# Altium PCB MK2.PcbDoc (part 3 of 7)
Units mil, origin at the board's own origin, x right, y up, seen from the top; angles counter-clockwise.
Board outline 3950 x 3965 mil, 2 copper layers (Top Layer, Bottom Layer); 19 components, 37 nets, 113 pads, 8 vias.
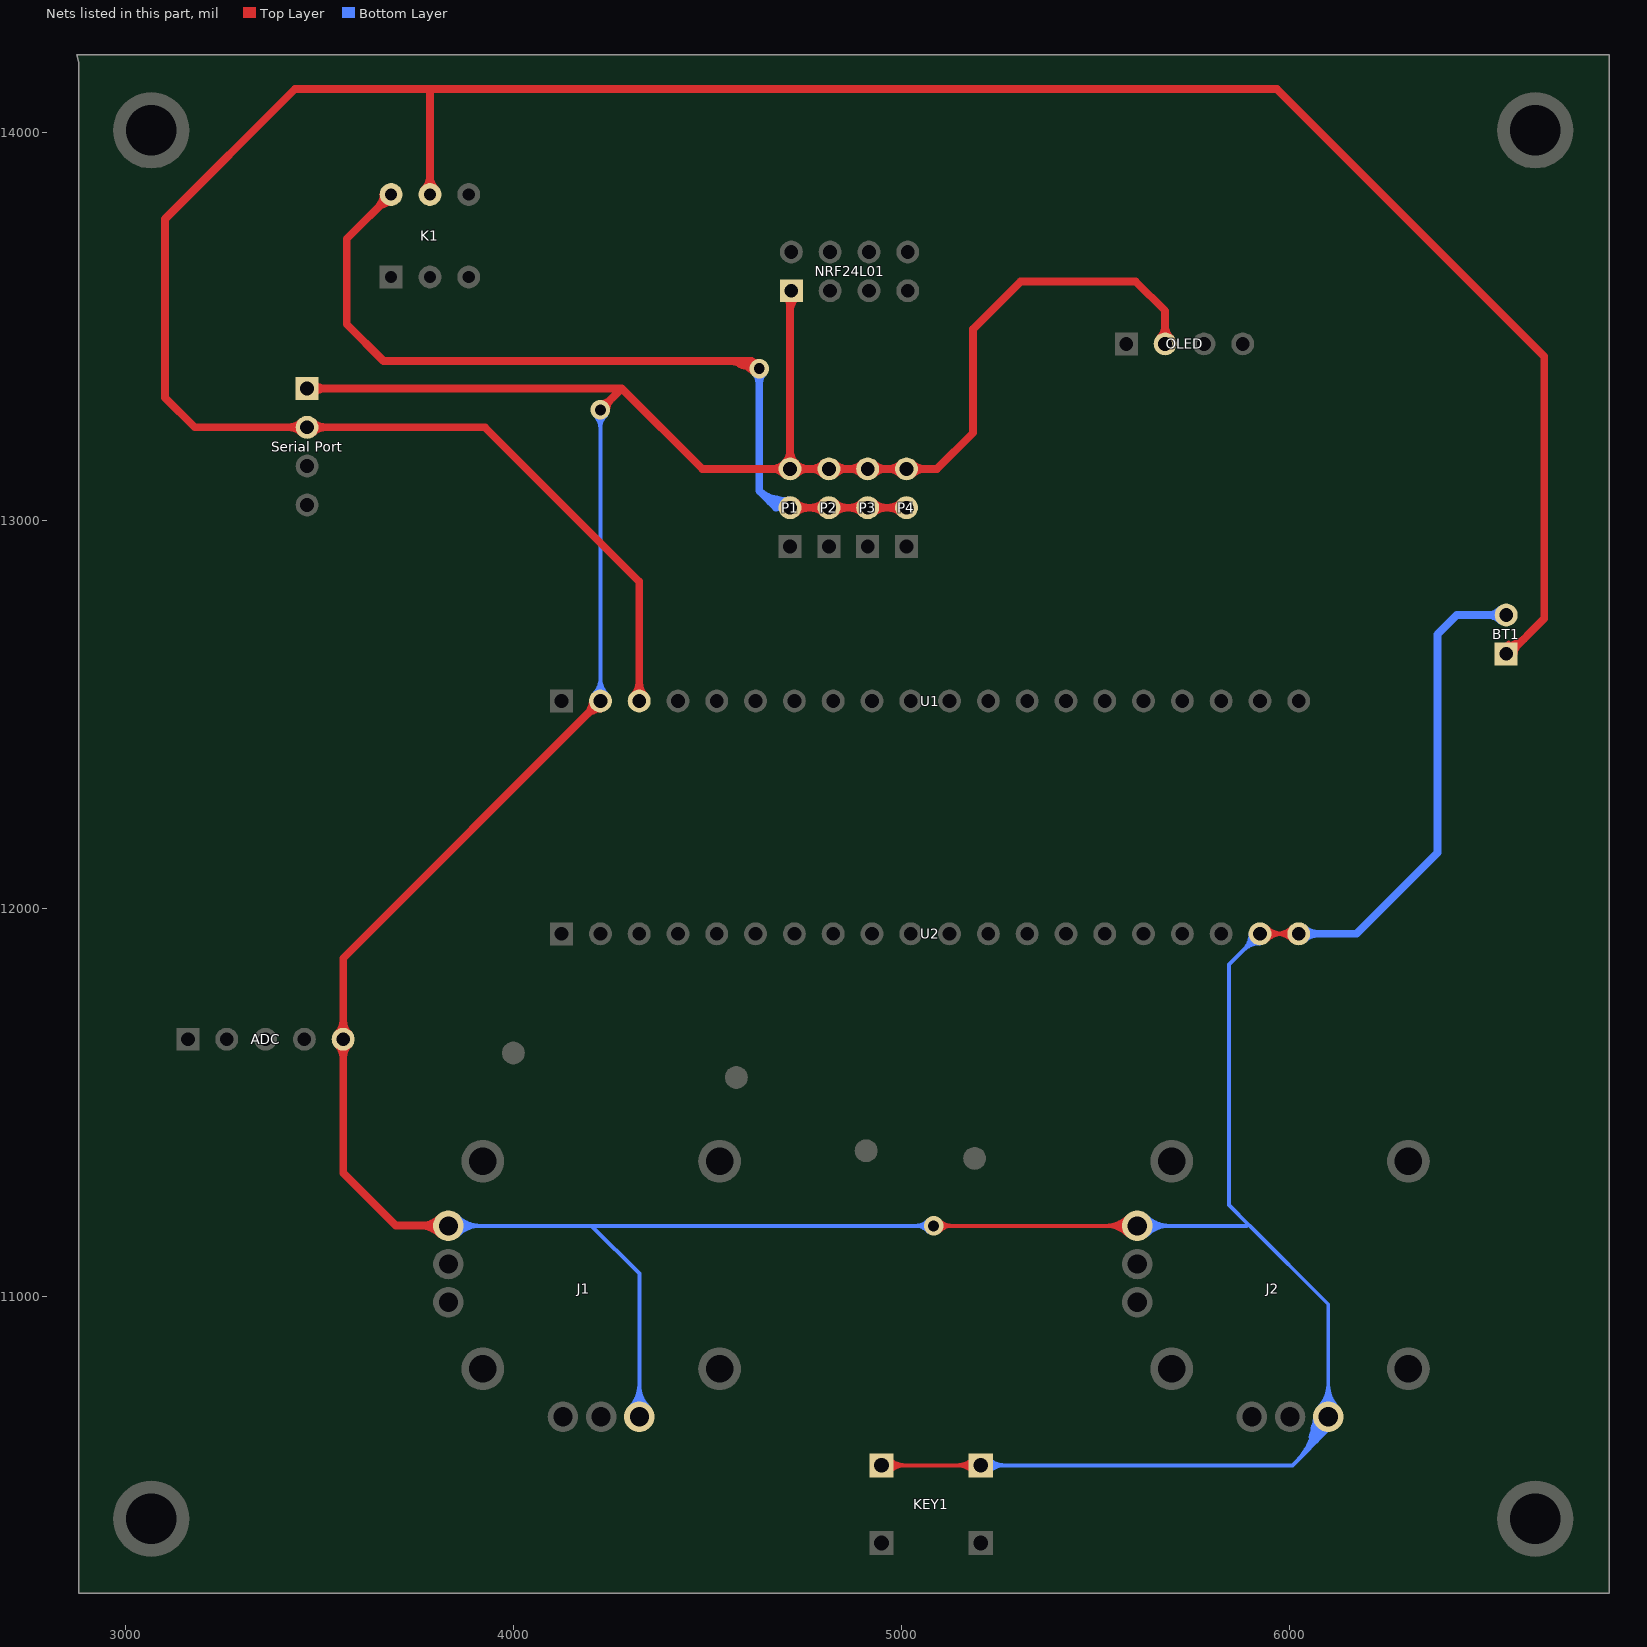
[diagram p3: the nets of this part, all layers, seen from the top]

## Via types
v1: diameter 50, hole 28, Top Layer to Bottom Layer, 8 vias

## Nets (pads, with @x,y where several pads share a name; then routed paths per layer and width w, separated by ;. In a path a pad name is that pad's centre, name@x,y a point inside that pad or via, vN(x,y) a via of type N, cw(c..) or ccw(c..) an arc to the next point about the centre after c; other vN are vias at no path point) (continued)
5V: "Serial Port.2" BT1.1 K1.5 U1.3 | length 8801.9
  Top Layer w10: BT1.1@6557.54,12660.35 ccw(c6544.06,12697.13) 6581.9,12687 ; BT1.1@6559.09,12656.1 BT1.1@6559.09,12678.54 ; BT1.1@6553.62,12656.1 cw(c6594.59,12656.1) 6565.62,12685.07 ccw(c6594.59,12656.1) BT1.1@6553.62,12656.1
  Top Layer w20: K1.5@3785.08,13839.96 3785.08,14106.1 3779.57,14111.61 ; U1.3@4324.45,12534.45 4324.45,12842.32 3926.81,13239.96 3468.54,13239.96 3178.78,13239.96 3102.4,13316.34 3102.4,13776.97 3437.05,14111.61 3779.57,14111.61 ; BT1.1@6565.3,12653.23 6565.3,12654.99 6657.52,12747.2 6657.52,13422.64 5968.54,14111.61 3779.57,14111.61 ; 3421.4,13239.96 cw(c3421.4,13192.82) 3454.74,13226.15 ; 3421.4,13239.96 ccw(c3421.4,13287.1) 3454.74,13253.77 ; 3421.4,13239.96 ccw(c3421.4,13287.1) 3454.74,13253.77 ; 3421.4,13239.96 cw(c3421.4,13192.82) 3454.74,13226.15 ; 3421.4,13239.96 ccw(c3421.4,13287.1) 3454.74,13253.77 ; 3421.4,13239.96 cw(c3421.4,13192.82) 3454.74,13226.15 ; 3482.35,13226.15 cw(c3515.69,13192.82) 3515.69,13239.96 ; 3482.35,13226.15 cw(c3515.69,13192.82) 3515.69,13239.96 ; 3482.35,13226.15 cw(c3515.69,13192.82) 3515.69,13239.96 ; 3482.35,13253.77 ccw(c3515.69,13287.1) 3515.69,13239.96 ; 3482.35,13253.77 ccw(c3515.69,13287.1) 3515.69,13239.96 ; 3482.35,13253.77 ccw(c3515.69,13287.1) 3515.69,13239.96 ; K1.5@3771.27,13853.77 ccw(c3737.94,13887.1) 3785.08,13887.1 ; K1.5@3771.27,13853.77 ccw(c3737.94,13887.1) 3785.08,13887.1 ; K1.5@3771.27,13853.77 ccw(c3737.94,13887.1) 3785.08,13887.1 ; 3785.08,13887.1 ccw(c3832.22,13887.1) K1.5@3798.89,13853.77 ; 3785.08,13887.1 ccw(c3832.22,13887.1) K1.5@3798.89,13853.77 ; 3785.08,13887.1 ccw(c3832.22,13887.1) K1.5@3798.89,13853.77 ; U1.3@4310.64,12548.26 ccw(c4277.31,12581.59) 4324.45,12581.59 ; U1.3@4310.64,12548.26 ccw(c4277.31,12581.59) 4324.45,12581.59 ; U1.3@4310.64,12548.26 ccw(c4277.31,12581.59) 4324.45,12581.59 ; 4324.45,12581.59 ccw(c4371.59,12581.59) U1.3@4338.26,12548.26 ; 4324.45,12581.59 ccw(c4371.59,12581.59) U1.3@4338.26,12548.26 ; 4324.45,12581.59 ccw(c4371.59,12581.59) U1.3@4338.26,12548.26 ; BT1.1@6558.65,12656.25 cw(c6597.9,12643.21) BT1.1@6587.19,12683.16 ; BT1.1@6558.65,12656.25 cw(c6597.9,12643.21) BT1.1@6587.19,12683.16 ; BT1.1@6558.65,12656.25 cw(c6597.9,12643.21) BT1.1@6587.19,12683.16 ; BT1.1@6558.65,12656.25 cw(c6597.9,12643.21) BT1.1@6587.19,12683.16 ; BT1.1@6558.65,12656.25 cw(c6597.9,12643.21) BT1.1@6587.19,12683.16 ; BT1.1@6558.65,12656.25 cw(c6597.9,12643.21) BT1.1@6587.19,12683.16 ; BT1.1@6559.09,12675.63 ccw(c6559.09,12740.45) 6604.93,12694.62 ; BT1.1@6559.09,12675.63 ccw(c6559.09,12740.45) 6604.93,12694.62 ; BT1.1@6559.09,12675.63 ccw(c6559.09,12740.45) 6604.93,12694.62 ; BT1.1@6559.09,12675.63 ccw(c6559.09,12740.45) 6604.93,12694.62 ; BT1.1@6578.62,12656.1 cw(c6608.09,12656.1) BT1.1@6587.25,12676.94 ; BT1.1@6578.62,12656.1 cw(c6608.09,12656.1) BT1.1@6587.25,12676.94 ; BT1.1@6578.62,12656.1 cw(c6608.09,12656.1) BT1.1@6587.25,12676.94 ; BT1.1@6578.62,12656.1 cw(c6608.09,12656.1) BT1.1@6587.25,12676.94
C-5: K1.6 P1.2 P2.2 P3.2 P4.2 | length 5414.1
  Top Layer w20: K1.6@3685.08,13839.96 3570.91,13725.79 3570.91,13505.32 3665.39,13410.83 4311.06,13410.83 ; 4315,13410.83 4311.06,13410.83 ; v1(4633.9,13391.14) 4614.21,13410.83 ; P1.2@4713.43,13032.8 P2.2@4813.43,13032.8 P3.2@4913.43,13032.8 P4.2@5013.43,13032.8 ; 3651.74,13806.63 cw(c3685.08,13773.29) K1.6@3685.08,13820.43 ; 3651.74,13806.63 ccw(c3618.41,13839.96) K1.6@3665.55,13839.96 ; 3651.74,13806.63 ccw(c3618.41,13839.96) K1.6@3665.55,13839.96 ; 3651.74,13806.63 cw(c3685.08,13773.29) K1.6@3685.08,13820.43 ; 3651.74,13806.63 ccw(c3618.41,13839.96) K1.6@3665.55,13839.96 ; 3651.74,13806.63 cw(c3685.08,13773.29) K1.6@3685.08,13820.43 ; 3659.16,13816.1 cw(c3691.75,13807.36) K1.6@3684.98,13840.42 ; 3659.16,13816.1 cw(c3691.75,13807.36) K1.6@3684.98,13840.42 ; 3659.16,13816.1 cw(c3691.75,13807.36) K1.6@3684.98,13840.42 ; 3661.21,13814.04 ccw(c3652.48,13846.64) K1.6@3685.54,13839.87 ; 3661.21,13814.04 ccw(c3652.48,13846.64) K1.6@3685.54,13839.87 ; 3661.21,13814.04 ccw(c3652.48,13846.64) K1.6@3685.54,13839.87 ; 4311.06,13410.83 4614.21,13410.83 ; 4550.16,13410.83 cw(c4550.16,13307.4) v1@4623.29,13380.54 ; 4550.16,13410.83 cw(c4550.16,13307.4) v1@4623.29,13380.54 ; 4550.16,13410.83 cw(c4550.16,13307.4) v1@4623.29,13380.54 ; 4584.17,13403.12 ccw(c4604.44,13438.23) v1@4625.94,13403.86 ; 4584.17,13403.12 ccw(c4604.44,13438.23) v1@4625.94,13403.86 ; 4584.17,13403.12 ccw(c4604.44,13438.23) v1@4625.94,13403.86 ; 4598.44,13410.83 cw(c4598.44,13355.69) v1@4637.43,13394.68 ; 4598.44,13410.83 cw(c4598.44,13355.69) v1@4637.43,13394.68 ; 4598.44,13410.83 cw(c4598.44,13355.69) v1@4637.43,13394.68 ; 4610.3,13410.34 cw(c4601.47,13395.05) v1@4619.01,13392.94 ; 4610.3,13410.34 cw(c4601.47,13395.05) v1@4619.01,13392.94 ; 4610.3,13410.34 cw(c4601.47,13395.05) v1@4619.01,13392.94 ; 4614.21,13410.83 cw(c4601.25,13397.86) v1@4619.21,13394.17 ; 4614.21,13410.83 ccw(c4627.18,13423.79) v1@4630.87,13405.83 ; 4614.21,13410.83 ccw(c4627.18,13423.79) v1@4630.87,13405.83 ; 4614.21,13410.83 cw(c4601.25,13397.86) v1@4619.21,13394.17 ; 4614.21,13410.83 ccw(c4627.18,13423.79) v1@4630.87,13405.83 ; 4614.21,13410.83 cw(c4601.25,13397.86) v1@4619.21,13394.17 ; 4615.05,13407.6 ccw(c4624.91,13424.68) v1@4630.02,13405.63 ; 4615.05,13407.6 ccw(c4624.91,13424.68) v1@4630.02,13405.63 ; 4615.05,13407.6 ccw(c4624.91,13424.68) v1@4630.02,13405.63 ; P1.2@4727.23,13018.99 cw(c4760.57,12985.65) 4760.57,13032.8 ; P1.2@4727.23,13018.99 cw(c4760.57,12985.65) 4760.57,13032.8 ; P1.2@4727.23,13018.99 cw(c4760.57,12985.65) 4760.57,13032.8 ; P1.2@4727.23,13046.6 ccw(c4760.57,13079.94) 4760.57,13032.8 ; P1.2@4727.23,13046.6 ccw(c4760.57,13079.94) 4760.57,13032.8 ; P1.2@4727.23,13046.6 ccw(c4760.57,13079.94) 4760.57,13032.8 ; 4766.28,13032.8 cw(c4766.28,12985.65) P2.2@4799.62,13018.99 ; 4766.28,13032.8 ccw(c4766.28,13079.94) P2.2@4799.62,13046.6 ; 4766.28,13032.8 ccw(c4766.28,13079.94) P2.2@4799.62,13046.6 ; 4766.28,13032.8 cw(c4766.28,12985.65) P2.2@4799.62,13018.99 ; 4766.28,13032.8 ccw(c4766.28,13079.94) P2.2@4799.62,13046.6 ; 4766.28,13032.8 cw(c4766.28,12985.65) P2.2@4799.62,13018.99 ; P2.2@4827.23,13018.99 cw(c4860.57,12985.65) 4860.57,13032.8 ; P2.2@4827.23,13018.99 cw(c4860.57,12985.65) 4860.57,13032.8 ; P2.2@4827.23,13018.99 cw(c4860.57,12985.65) 4860.57,13032.8 ; P2.2@4827.23,13046.6 ccw(c4860.57,13079.94) 4860.57,13032.8 ; P2.2@4827.23,13046.6 ccw(c4860.57,13079.94) 4860.57,13032.8 ; P2.2@4827.23,13046.6 ccw(c4860.57,13079.94) 4860.57,13032.8 ; 4866.28,13032.8 cw(c4866.28,12985.65) P3.2@4899.62,13018.99 ; 4866.28,13032.8 ccw(c4866.28,13079.94) P3.2@4899.62,13046.6 ; 4866.28,13032.8 ccw(c4866.28,13079.94) P3.2@4899.62,13046.6 ; 4866.28,13032.8 cw(c4866.28,12985.65) P3.2@4899.62,13018.99 ; 4866.28,13032.8 ccw(c4866.28,13079.94) P3.2@4899.62,13046.6 ; 4866.28,13032.8 cw(c4866.28,12985.65) P3.2@4899.62,13018.99 ; P3.2@4927.23,13018.99 cw(c4960.57,12985.65) 4960.57,13032.8 ; P3.2@4927.23,13018.99 cw(c4960.57,12985.65) 4960.57,13032.8 ; P3.2@4927.23,13018.99 cw(c4960.57,12985.65) 4960.57,13032.8 ; P3.2@4927.23,13046.6 ccw(c4960.57,13079.94) 4960.57,13032.8 ; P3.2@4927.23,13046.6 ccw(c4960.57,13079.94) 4960.57,13032.8 ; P3.2@4927.23,13046.6 ccw(c4960.57,13079.94) 4960.57,13032.8 ; 4966.28,13032.8 cw(c4966.28,12985.65) P4.2@4999.62,13018.99 ; 4966.28,13032.8 ccw(c4966.28,13079.94) P4.2@4999.62,13046.6 ; 4966.28,13032.8 ccw(c4966.28,13079.94) P4.2@4999.62,13046.6 ; 4966.28,13032.8 cw(c4966.28,12985.65) P4.2@4999.62,13018.99 ; 4966.28,13032.8 ccw(c4966.28,13079.94) P4.2@4999.62,13046.6 ; 4966.28,13032.8 cw(c4966.28,12985.65) P4.2@4999.62,13018.99
  Bottom Layer w20: v1(4633.9,13391.14) 4633.9,13076.18 ; 4677.28,13032.8 4633.9,13076.18 ; v1@4623.29,13380.54 cw(c4597.68,13354.93) 4633.9,13354.93 ; v1@4623.29,13380.54 cw(c4597.68,13354.93) 4633.9,13354.93 ; v1@4623.29,13380.54 cw(c4597.68,13354.93) 4633.9,13354.93 ; 4633.9,13076.18 ccw(c4695.26,13137.54) P1.2@4710.09,13052.04 ; 4633.9,13076.18 ccw(c4695.26,13137.54) P1.2@4710.09,13052.04 ; 4633.9,13076.18 ccw(c4695.26,13137.54) P1.2@4710.09,13052.04 ; 4633.9,13354.93 cw(c4670.11,13354.93) v1@4644.5,13380.54 ; 4633.9,13354.93 cw(c4670.11,13354.93) v1@4644.5,13380.54 ; 4633.9,13354.93 cw(c4670.11,13354.93) v1@4644.5,13380.54 ; 4661.16,13048.92 ccw(c4703.32,13091.07) P1.2@4713.51,13032.33 ; 4661.16,13048.92 ccw(c4703.32,13091.07) P1.2@4713.51,13032.33 ; 4661.16,13048.92 ccw(c4703.32,13091.07) P1.2@4713.51,13032.33 ; 4670.91,13055.58 cw(c4665.21,12992.58) P1.2@4713.79,13033.1 ; 4670.91,13055.58 cw(c4665.21,12992.58) P1.2@4713.79,13033.1 ; 4670.91,13055.58 cw(c4665.21,12992.58) P1.2@4713.79,13033.1
GND: "Serial Port.1" ADC.5 BT1.2 J1.1 J1.6 J2.1 J2.6 KEY1.1 NRF24L01.1 OLED.2 P1.3 P2.3 P3.3 P4.3 U1.2 U2.19 U2.20 | length 46446.5
  Top Layer w10: KEY1.1@4948.86,10564.37 KEY1.1@5204.76,10564.37 ; v1(5083.43,11181.77) J2.6@5608.27,11181.77 ; U2.19@5924.45,11934.45 U2.20@6024.45,11934.45 ; 3503.62,13339.96 ccw(c3503.62,13304.89) 3478.82,13329.69 cw(c3503.62,13304.89) 3503.62,13339.96 ; 3503.62,13339.96 cw(c3503.62,13375.03) 3478.82,13350.23 ccw(c3503.62,13375.03) 3503.62,13339.96 ; 3527.76,13339.96 ccw(c3527.76,13280.75) 3485.89,13322.62 cw(c3527.76,13280.75) 3527.76,13339.96 ; 3527.76,13339.96 cw(c3527.76,13399.18) 3485.89,13357.3 ccw(c3527.76,13399.18) 3527.76,13339.96 ; 3561.46,11603.58 ccw(c3502.24,11603.58) 3544.11,11645.45 cw(c3502.24,11603.58) 3561.46,11603.58 ; 3561.46,11603.58 cw(c3620.67,11603.58) 3578.8,11645.45 ccw(c3620.67,11603.58) 3561.46,11603.58 ; 3561.46,11627.72 ccw(c3526.38,11627.72) 3551.18,11652.52 cw(c3526.38,11627.72) 3561.46,11627.72 ; 3561.46,11627.72 cw(c3596.53,11627.72) 3571.73,11652.52 ccw(c3596.53,11627.72) 3561.46,11627.72 ; 3561.46,11697.87 ccw(c3596.53,11697.87) 3571.73,11673.07 cw(c3596.53,11697.87) 3561.46,11697.87 ; 3561.46,11697.87 cw(c3526.38,11697.87) 3551.18,11673.07 ccw(c3526.38,11697.87) 3561.46,11697.87 ; 3561.46,11722.01 ccw(c3620.67,11722.01) 3578.8,11680.14 cw(c3620.67,11722.01) 3561.46,11722.01 ; 3561.46,11722.01 cw(c3502.24,11722.01) 3544.11,11680.14 ccw(c3502.24,11722.01) 3561.46,11722.01 ; 4182.58,12492.58 ccw(c4140.71,12534.45) 4199.92,12534.45 cw(c4140.71,12534.45) 4182.58,12492.58 ; 4182.58,12492.58 cw(c4224.45,12450.71) 4224.45,12509.92 ccw(c4224.45,12450.71) 4182.58,12492.58 ; 4193.93,12512.1 cw(c4231.06,12502.15) U1.2@4223.35,12539.81 ; 4193.93,12512.1 cw(c4231.06,12502.15) U1.2@4223.35,12539.81 ; 4193.93,12512.1 cw(c4231.06,12502.15) U1.2@4223.35,12539.81 ; 4193.93,12512.1 cw(c4231.06,12502.15) U1.2@4223.35,12539.81 ; 4193.93,12512.1 cw(c4231.06,12502.15) U1.2@4223.35,12539.81 ; 4193.93,12512.1 cw(c4231.06,12502.15) U1.2@4223.35,12539.81 ; 4193.93,12512.1 cw(c4231.06,12502.15) U1.2@4223.35,12539.81 ; 4193.93,12512.1 cw(c4231.06,12502.15) U1.2@4223.35,12539.81 ; 4193.93,12512.1 cw(c4231.06,12502.15) U1.2@4223.35,12539.81 ; 4199.65,12509.65 ccw(c4174.85,12534.45) 4209.92,12534.45 cw(c4174.85,12534.45) 4199.65,12509.65 ; 4199.65,12509.65 cw(c4224.45,12484.85) 4224.45,12519.92 ccw(c4224.45,12484.85) 4199.65,12509.65 ; 4202.1,12503.93 ccw(c4192.15,12541.06) U1.2@4229.81,12533.35 ; 4202.1,12503.93 ccw(c4192.15,12541.06) U1.2@4229.81,12533.35 ; 4202.1,12503.93 ccw(c4192.15,12541.06) U1.2@4229.81,12533.35 ; 4202.1,12503.93 ccw(c4192.15,12541.06) U1.2@4229.81,12533.35 ; 4202.1,12503.93 ccw(c4192.15,12541.06) U1.2@4229.81,12533.35 ; 4202.1,12503.93 ccw(c4192.15,12541.06) U1.2@4229.81,12533.35 ; 4202.1,12503.93 ccw(c4192.15,12541.06) U1.2@4229.81,12533.35 ; 4202.1,12503.93 ccw(c4192.15,12541.06) U1.2@4229.81,12533.35 ; 4202.1,12503.93 ccw(c4192.15,12541.06) U1.2@4229.81,12533.35 ; v1(4224.45,13284.84) ccw(c4217.44,13319.09) 4251.2,13310.04 ; v1(4224.45,13284.84) ccw(c4217.44,13319.09) 4251.2,13310.04 ; v1(4224.45,13284.84) cw(c4258.69,13277.83) 4249.65,13311.59 ; v1(4224.45,13284.84) cw(c4258.69,13277.83) 4249.65,13311.59 ; v1(4224.45,13284.84) ccw(c4217.44,13319.09) 4251.2,13310.04 ; v1(4224.45,13284.84) cw(c4258.69,13277.83) 4249.65,13311.59 ; v1(4224.45,13284.84) ccw(c4217.44,13319.09) 4251.2,13310.04 ; v1(4224.45,13284.84) cw(c4258.69,13277.83) 4249.65,13311.59 ; v1(4224.45,13284.84) ccw(c4217.44,13319.09) 4251.2,13310.04 ; v1(4224.45,13284.84) cw(c4258.69,13277.83) 4249.65,13311.59 ; v1(4224.45,13284.84) ccw(c4217.44,13319.09) 4251.2,13310.04 ; v1(4224.45,13284.84) cw(c4258.69,13277.83) 4249.65,13311.59 ; v1(4224.45,13284.84) ccw(c4217.44,13319.09) 4251.2,13310.04 ; v1(4224.45,13284.84) cw(c4258.69,13277.83) 4249.65,13311.59 ; v1(4224.45,13284.84) ccw(c4217.44,13319.09) 4251.2,13310.04 ; v1(4224.45,13284.84) cw(c4258.69,13277.83) 4249.65,13311.59 ; v1(4224.45,13284.84) ccw(c4217.44,13319.09) 4251.2,13310.04 ; v1(4224.45,13284.84) cw(c4258.69,13277.83) 4249.65,13311.59 ; 4258.59,13318.98 ccw(c4292.73,13284.84) 4244.45,13284.84 cw(c4292.73,13284.84) 4258.59,13318.98 ; 4258.59,13318.98 cw(c4224.45,13353.13) 4224.45,13304.84 ccw(c4224.45,13353.13) 4258.59,13318.98 ; 4713.43,13192.01 ccw(c4772.64,13192.01) 4730.77,13150.14 cw(c4772.64,13192.01) 4713.43,13192.01 ; 4713.43,13192.01 cw(c4654.21,13192.01) 4696.08,13150.14 ccw(c4654.21,13192.01) 4713.43,13192.01 ; KEY1.1@4960.17,10553.06 cw(c4987.49,10525.74) 4987.49,10564.37 ; KEY1.1@4960.17,10553.06 cw(c4987.49,10525.74) 4987.49,10564.37 ; KEY1.1@4960.17,10553.06 cw(c4987.49,10525.74) 4987.49,10564.37 ; KEY1.1@4960.17,10553.06 cw(c4987.49,10525.74) 4987.49,10564.37 ; KEY1.1@4960.17,10553.06 cw(c4987.49,10525.74) 4987.49,10564.37 ; KEY1.1@4960.17,10575.68 ccw(c4987.49,10603) 4987.49,10564.37 ; KEY1.1@4960.17,10575.68 ccw(c4987.49,10603) 4987.49,10564.37 ; KEY1.1@4960.17,10575.68 ccw(c4987.49,10603) 4987.49,10564.37 ; KEY1.1@4960.17,10575.68 ccw(c4987.49,10603) 4987.49,10564.37 ; KEY1.1@4960.17,10575.68 ccw(c4987.49,10603) 4987.49,10564.37 ; KEY1.1@4967.24,10545.99 cw(c5011.63,10501.6) 5011.63,10564.37 ; KEY1.1@4967.24,10545.99 cw(c5011.63,10501.6) 5011.63,10564.37 ; KEY1.1@4967.24,10545.99 cw(c5011.63,10501.6) 5011.63,10564.37 ; KEY1.1@4967.24,10545.99 cw(c5011.63,10501.6) 5011.63,10564.37 ; KEY1.1@4967.24,10545.99 cw(c5011.63,10501.6) 5011.63,10564.37 ; KEY1.1@4967.24,10582.75 ccw(c5011.63,10627.14) 5011.63,10564.37 ; KEY1.1@4967.24,10582.75 ccw(c5011.63,10627.14) 5011.63,10564.37 ; KEY1.1@4967.24,10582.75 ccw(c5011.63,10627.14) 5011.63,10564.37 ; KEY1.1@4967.24,10582.75 ccw(c5011.63,10627.14) 5011.63,10564.37 ; KEY1.1@4967.24,10582.75 ccw(c5011.63,10627.14) 5011.63,10564.37 ; v1@5097.57,11167.63 cw(c5131.71,11133.49) 5131.71,11181.77 ; v1@5097.57,11167.63 cw(c5131.71,11133.49) 5131.71,11181.77 ; v1@5097.57,11167.63 cw(c5131.71,11133.49) 5131.71,11181.77 ; v1@5097.57,11167.63 cw(c5131.71,11133.49) 5131.71,11181.77 ; v1@5097.57,11167.63 cw(c5131.71,11133.49) 5131.71,11181.77 ; v1@5097.57,11167.63 cw(c5131.71,11133.49) 5131.71,11181.77 ; v1@5097.57,11195.91 ccw(c5131.71,11230.06) 5131.71,11181.77 ; v1@5097.57,11195.91 ccw(c5131.71,11230.06) 5131.71,11181.77 ; v1@5097.57,11195.91 ccw(c5131.71,11230.06) 5131.71,11181.77 ; v1@5097.57,11195.91 ccw(c5131.71,11230.06) 5131.71,11181.77 ; v1@5097.57,11195.91 ccw(c5131.71,11230.06) 5131.71,11181.77 ; v1@5097.57,11195.91 ccw(c5131.71,11230.06) 5131.71,11181.77 ; 5141.99,10564.37 cw(c5141.99,10501.6) KEY1.1@5186.38,10545.99 ; 5141.99,10564.37 ccw(c5141.99,10627.14) KEY1.1@5186.38,10582.75 ; 5141.99,10564.37 ccw(c5141.99,10627.14) KEY1.1@5186.38,10582.75 ; 5141.99,10564.37 cw(c5141.99,10501.6) KEY1.1@5186.38,10545.99 ; 5141.99,10564.37 ccw(c5141.99,10627.14) KEY1.1@5186.38,10582.75 ; 5141.99,10564.37 cw(c5141.99,10501.6) KEY1.1@5186.38,10545.99 ; 5141.99,10564.37 ccw(c5141.99,10627.14) KEY1.1@5186.38,10582.75 ; 5141.99,10564.37 cw(c5141.99,10501.6) KEY1.1@5186.38,10545.99 ; 5141.99,10564.37 ccw(c5141.99,10627.14) KEY1.1@5186.38,10582.75 ; 5141.99,10564.37 cw(c5141.99,10501.6) KEY1.1@5186.38,10545.99 ; 5166.14,10564.37 cw(c5166.14,10525.74) KEY1.1@5193.45,10553.06 ; 5166.14,10564.37 ccw(c5166.14,10603) KEY1.1@5193.45,10575.68 ; 5166.14,10564.37 ccw(c5166.14,10603) KEY1.1@5193.45,10575.68 ; 5166.14,10564.37 cw(c5166.14,10525.74) KEY1.1@5193.45,10553.06 ; 5166.14,10564.37 ccw(c5166.14,10603) KEY1.1@5193.45,10575.68 ; 5166.14,10564.37 cw(c5166.14,10525.74) KEY1.1@5193.45,10553.06 ; 5166.14,10564.37 ccw(c5166.14,10603) KEY1.1@5193.45,10575.68 ; 5166.14,10564.37 cw(c5166.14,10525.74) KEY1.1@5193.45,10553.06 ; 5166.14,10564.37 ccw(c5166.14,10603) KEY1.1@5193.45,10575.68 ; 5166.14,10564.37 cw(c5166.14,10525.74) KEY1.1@5193.45,10553.06 ; 5525.29,11181.77 cw(c5525.29,11098.79) J2.6@5583.96,11157.47 ; 5525.29,11181.77 ccw(c5525.29,11264.75) J2.6@5583.96,11206.08 ; 5525.29,11181.77 ccw(c5525.29,11264.75) J2.6@5583.96,11206.08 ; 5525.29,11181.77 cw(c5525.29,11098.79) J2.6@5583.96,11157.47 ; 5525.29,11181.77 ccw(c5525.29,11264.75) J2.6@5583.96,11206.08 ; 5525.29,11181.77 cw(c5525.29,11098.79) J2.6@5583.96,11157.47 ; 5525.29,11181.77 ccw(c5525.29,11264.75) J2.6@5583.96,11206.08 ; 5525.29,11181.77 cw(c5525.29,11098.79) J2.6@5583.96,11157.47 ; 5525.29,11181.77 ccw(c5525.29,11264.75) J2.6@5583.96,11206.08 ; 5525.29,11181.77 cw(c5525.29,11098.79) J2.6@5583.96,11157.47 ; 5525.29,11181.77 ccw(c5525.29,11264.75) J2.6@5583.96,11206.08 ; 5525.29,11181.77 cw(c5525.29,11098.79) J2.6@5583.96,11157.47 ; 5549.43,11181.77 cw(c5549.43,11122.94) J2.6@5591.04,11164.54 ; 5549.43,11181.77 ccw(c5549.43,11240.61) J2.6@5591.04,11199 ; 5549.43,11181.77 ccw(c5549.43,11240.61) J2.6@5591.04,11199 ; 5549.43,11181.77 cw(c5549.43,11122.94) J2.6@5591.04,11164.54 ; 5549.43,11181.77 ccw(c5549.43,11240.61) J2.6@5591.04,11199 ; 5549.43,11181.77 cw(c5549.43,11122.94) J2.6@5591.04,11164.54 ; 5549.43,11181.77 ccw(c5549.43,11240.61) J2.6@5591.04,11199 ; 5549.43,11181.77 cw(c5549.43,11122.94) J2.6@5591.04,11164.54 ; 5549.43,11181.77 ccw(c5549.43,11240.61) J2.6@5591.04,11199 ; 5549.43,11181.77 cw(c5549.43,11122.94) J2.6@5591.04,11164.54 ; 5549.43,11181.77 ccw(c5549.43,11240.61) J2.6@5591.04,11199 ; 5549.43,11181.77 cw(c5549.43,11122.94) J2.6@5591.04,11164.54 ; U2.19@5934.72,11924.18 cw(c5959.52,11899.38) 5959.52,11934.45 ; U2.19@5934.72,11924.18 cw(c5959.52,11899.38) 5959.52,11934.45 ; U2.19@5934.72,11924.18 cw(c5959.52,11899.38) 5959.52,11934.45 ; U2.19@5934.72,11924.18 cw(c5959.52,11899.38) 5959.52,11934.45 ; U2.19@5934.72,11924.18 cw(c5959.52,11899.38) 5959.52,11934.45 ; U2.19@5934.72,11924.18 cw(c5959.52,11899.38) 5959.52,11934.45 ; U2.19@5934.72,11944.72 ccw(c5959.52,11969.52) 5959.52,11934.45 ; U2.19@5934.72,11944.72 ccw(c5959.52,11969.52) 5959.52,11934.45 ; U2.19@5934.72,11944.72 ccw(c5959.52,11969.52) 5959.52,11934.45 ; U2.19@5934.72,11944.72 ccw(c5959.52,11969.52) 5959.52,11934.45 ; U2.19@5934.72,11944.72 ccw(c5959.52,11969.52) 5959.52,11934.45 ; U2.19@5934.72,11944.72 ccw(c5959.52,11969.52) 5959.52,11934.45 ; U2.19@5941.79,11917.11 cw(c5983.66,11875.23) 5983.66,11934.45 ; U2.19@5941.79,11917.11 cw(c5983.66,11875.23) 5983.66,11934.45 ; U2.19@5941.79,11917.11 cw(c5983.66,11875.23) 5983.66,11934.45 ; U2.19@5941.79,11917.11 cw(c5983.66,11875.23) 5983.66,11934.45 ; U2.19@5941.79,11917.11 cw(c5983.66,11875.23) 5983.66,11934.45 ; U2.19@5941.79,11917.11 cw(c5983.66,11875.23) 5983.66,11934.45 ; U2.19@5941.79,11951.79 ccw(c5983.66,11993.66) 5983.66,11934.45 ; U2.19@5941.79,11951.79 ccw(c5983.66,11993.66) 5983.66,11934.45 ; U2.19@5941.79,11951.79 ccw(c5983.66,11993.66) 5983.66,11934.45 ; U2.19@5941.79,11951.79 ccw(c5983.66,11993.66) 5983.66,11934.45 ; U2.19@5941.79,11951.79 ccw(c5983.66,11993.66) 5983.66,11934.45 ; U2.19@5941.79,11951.79 ccw(c5983.66,11993.66) 5983.66,11934.45 ; 5965.23,11934.45 cw(c5965.23,11875.23) U2.20@6007.11,11917.11 ; 5965.23,11934.45 ccw(c5965.23,11993.66) U2.20@6007.11,11951.79 ; 5965.23,11934.45 ccw(c5965.23,11993.66) U2.20@6007.11,11951.79 ; 5965.23,11934.45 cw(c5965.23,11875.23) U2.20@6007.11,11917.11 ; 5965.23,11934.45 ccw(c5965.23,11993.66) U2.20@6007.11,11951.79 ; 5965.23,11934.45 cw(c5965.23,11875.23) U2.20@6007.11,11917.11 ; 5965.23,11934.45 ccw(c5965.23,11993.66) U2.20@6007.11,11951.79 ; 5965.23,11934.45 cw(c5965.23,11875.23) U2.20@6007.11,11917.11 ; 5965.23,11934.45 ccw(c5965.23,11993.66) U2.20@6007.11,11951.79 ; 5965.23,11934.45 cw(c5965.23,11875.23) U2.20@6007.11,11917.11 ; 5965.23,11934.45 ccw(c5965.23,11993.66) U2.20@6007.11,11951.79 ; 5965.23,11934.45 cw(c5965.23,11875.23) U2.20@6007.11,11917.11 ; 5989.38,11934.45 cw(c5989.38,11899.38) U2.20@6014.18,11924.18 ; 5989.38,11934.45 ccw(c5989.38,11969.52) U2.20@6014.18,11944.72 ; 5989.38,11934.45 ccw(c5989.38,11969.52) U2.20@6014.18,11944.72 ; 5989.38,11934.45 cw(c5989.38,11899.38) U2.20@6014.18,11924.18 ; 5989.38,11934.45 ccw(c5989.38,11969.52) U2.20@6014.18,11944.72 ; 5989.38,11934.45 cw(c5989.38,11899.38) U2.20@6014.18,11924.18 ; 5989.38,11934.45 ccw(c5989.38,11969.52) U2.20@6014.18,11944.72 ; 5989.38,11934.45 cw(c5989.38,11899.38) U2.20@6014.18,11924.18 ; 5989.38,11934.45 ccw(c5989.38,11969.52) U2.20@6014.18,11944.72 ; 5989.38,11934.45 cw(c5989.38,11899.38) U2.20@6014.18,11924.18 ; 5989.38,11934.45 ccw(c5989.38,11969.52) U2.20@6014.18,11944.72 ; 5989.38,11934.45 cw(c5989.38,11899.38) U2.20@6014.18,11924.18 ; 3747.99,11182.48 cw(c3747.99,11097.08) 3808.37,11157.47 ccw(c3747.99,11097.08) 3747.99,11182.48 ; 3751.41,11182.48 ccw(c3751.41,11263.04) 3808.37,11206.08 cw(c3751.41,11263.04) 3751.41,11182.48 ; 3772.13,11182.48 cw(c3772.13,11121.23) 3815.44,11164.54 ccw(c3772.13,11121.23) 3772.13,11182.48 ; 3775.55,11182.48 ccw(c3775.55,11238.9) 3815.44,11199 cw(c3775.55,11238.9) 3775.55,11182.48 ; NRF24L01.1@4699.23,13574.59 cw(c4664.96,13540.32) 4713.43,13540.32 ccw(c4664.96,13540.32) NRF24L01.1@4699.23,13574.59 ; 4713.43,13525.11 cw(c4783.39,13525.11) 4733.92,13574.59 ccw(c4783.39,13525.11) 4713.43,13525.11 ; 4713.43,13549.25 cw(c4759.25,13549.25) 4726.85,13581.66 ccw(c4759.25,13549.25) 4713.43,13549.25
  Top Layer w20: 3468.54,13339.96 4279.57,13339.96 ; J1.6@3831.97,11182.48 3696.89,11182.48 3561.46,11317.91 ADC.5@3561.46,11662.8 3561.46,11871.46 U1.2@4224.45,12534.45 ; v1(4224.45,13284.84) 4279.57,13339.96 ; NRF24L01.1@4713.43,13588.78 P1.3@4713.43,13132.8 ; OLED.2@5666.19,13468.81 ccw(c5632.86,13502.14) 5680,13502.14 ccw(c5727.14,13502.14) OLED.2@5693.81,13468.81 ; OLED.2@5680,13455 5680,13540 5604.45,13615.55 5307.13,13615.55 5185.08,13493.5 5185.08,13225.79 5092.09,13132.8 P4.3@5013.43,13132.8 P3.3@4913.43,13132.8 P2.3@4813.43,13132.8 P1.3@4713.43,13132.8 ; 3482.35,13326.15 cw(c3515.69,13292.82) 3515.69,13339.96 ; 3482.35,13326.15 cw(c3515.69,13292.82) 3515.69,13339.96 ; 3482.35,13326.15 cw(c3515.69,13292.82) 3515.69,13339.96 ; 3482.35,13326.15 cw(c3515.69,13292.82) 3515.69,13339.96 ; 3482.35,13353.77 ccw(c3515.69,13387.1) 3515.69,13339.96 ; 3482.35,13353.77 ccw(c3515.69,13387.1) 3515.69,13339.96 ; 3482.35,13353.77 ccw(c3515.69,13387.1) 3515.69,13339.96 ; 3482.35,13353.77 ccw(c3515.69,13387.1) 3515.69,13339.96 ; ADC.5@3547.65,11648.99 cw(c3514.31,11615.65) 3561.46,11615.65 ; ADC.5@3547.65,11648.99 cw(c3514.31,11615.65) 3561.46,11615.65 ; ADC.5@3547.65,11648.99 cw(c3514.31,11615.65) 3561.46,11615.65 ; ADC.5@3547.65,11648.99 cw(c3514.31,11615.65) 3561.46,11615.65 ; ADC.5@3547.65,11676.6 ccw(c3514.31,11709.94) 3561.46,11709.94 ; ADC.5@3547.65,11676.6 ccw(c3514.31,11709.94) 3561.46,11709.94 ; ADC.5@3547.65,11676.6 ccw(c3514.31,11709.94) 3561.46,11709.94 ; ADC.5@3547.65,11676.6 ccw(c3514.31,11709.94) 3561.46,11709.94 ; 3561.46,11615.65 cw(c3608.6,11615.65) ADC.5@3575.26,11648.99 ; 3561.46,11615.65 cw(c3608.6,11615.65) ADC.5@3575.26,11648.99 ; 3561.46,11615.65 cw(c3608.6,11615.65) ADC.5@3575.26,11648.99 ; 3561.46,11615.65 cw(c3608.6,11615.65) ADC.5@3575.26,11648.99 ; 3561.46,11709.94 ccw(c3608.6,11709.94) ADC.5@3575.26,11676.6 ; 3561.46,11709.94 ccw(c3608.6,11709.94) ADC.5@3575.26,11676.6 ; 3561.46,11709.94 ccw(c3608.6,11709.94) ADC.5@3575.26,11676.6 ; 3561.46,11709.94 ccw(c3608.6,11709.94) ADC.5@3575.26,11676.6 ; 3760.06,11182.48 cw(c3760.06,11109.16) J1.6@3811.91,11161 ; 3760.06,11182.48 cw(c3760.06,11109.16) J1.6@3811.91,11161 ; 3760.06,11182.48 cw(c3760.06,11109.16) J1.6@3811.91,11161 ; 3760.06,11182.48 cw(c3760.06,11109.16) J1.6@3811.91,11161 ; 3763.48,11182.48 ccw(c3763.48,11250.97) J1.6@3811.91,11202.54 ; 3763.48,11182.48 ccw(c3763.48,11250.97) J1.6@3811.91,11202.54 ; 3763.48,11182.48 ccw(c3763.48,11250.97) J1.6@3811.91,11202.54 ; 3763.48,11182.48 ccw(c3763.48,11250.97) J1.6@3811.91,11202.54 ; 4191.11,12501.11 cw(c4224.45,12467.78) U1.2@4224.45,12514.92 ; 4191.11,12501.11 ccw(c4157.78,12534.45) U1.2@4204.92,12534.45 ; 4191.11,12501.11 ccw(c4157.78,12534.45) U1.2@4204.92,12534.45 ; 4191.11,12501.11 cw(c4224.45,12467.78) U1.2@4224.45,12514.92 ; 4191.11,12501.11 ccw(c4157.78,12534.45) U1.2@4204.92,12534.45 ; 4191.11,12501.11 cw(c4224.45,12467.78) U1.2@4224.45,12514.92 ; 4191.11,12501.11 ccw(c4157.78,12534.45) U1.2@4204.92,12534.45 ; 4191.11,12501.11 cw(c4224.45,12467.78) U1.2@4224.45,12514.92 ; 4198.53,12510.59 cw(c4231.12,12501.85) U1.2@4224.35,12534.91 ; 4198.53,12510.59 cw(c4231.12,12501.85) U1.2@4224.35,12534.91 ; 4198.53,12510.59 cw(c4231.12,12501.85) U1.2@4224.35,12534.91 ; 4198.53,12510.59 cw(c4231.12,12501.85) U1.2@4224.35,12534.91 ; 4198.53,12510.59 cw(c4231.12,12501.85) U1.2@4224.35,12534.91 ; 4198.53,12510.59 cw(c4231.12,12501.85) U1.2@4224.35,12534.91 ; 4200.58,12508.53 ccw(c4191.85,12541.12) U1.2@4224.91,12534.35 ; 4200.58,12508.53 ccw(c4191.85,12541.12) U1.2@4224.91,12534.35 ; 4200.58,12508.53 ccw(c4191.85,12541.12) U1.2@4224.91,12534.35 ; 4200.58,12508.53 ccw(c4191.85,12541.12) U1.2@4224.91,12534.35 ; 4200.58,12508.53 ccw(c4191.85,12541.12) U1.2@4224.91,12534.35 ; 4200.58,12508.53 ccw(c4191.85,12541.12) U1.2@4224.91,12534.35 ; v1@4224.45,13299.84 ccw(c4224.45,13336.06) 4250.06,13310.45 ; v1@4224.45,13299.84 ccw(c4224.45,13336.06) 4250.06,13310.45 ; v1@4224.45,13299.84 ccw(c4224.45,13336.06) 4250.06,13310.45 ; v1@4224.45,13299.84 ccw(c4224.45,13336.06) 4250.06,13310.45 ; v1@4239.45,13284.84 cw(c4275.66,13284.84) 4250.06,13310.45 ; v1@4239.45,13284.84 cw(c4275.66,13284.84) 4250.06,13310.45 ; v1@4239.45,13284.84 cw(c4275.66,13284.84) 4250.06,13310.45 ; v1@4239.45,13284.84 cw(c4275.66,13284.84) 4250.06,13310.45 ; 4279.57,13339.96 4486.73,13132.8 P1.3@4713.43,13132.8 ; 4666.28,13132.8 cw(c4666.28,13085.65) P1.3@4699.62,13118.99 ; 4666.28,13132.8 ccw(c4666.28,13179.94) P1.3@4699.62,13146.6 ; 4666.28,13132.8 ccw(c4666.28,13179.94) P1.3@4699.62,13146.6 ; 4666.28,13132.8 cw(c4666.28,13085.65) P1.3@4699.62,13118.99 ; 4666.28,13132.8 ccw(c4666.28,13179.94) P1.3@4699.62,13146.6 ; 4666.28,13132.8 cw(c4666.28,13085.65) P1.3@4699.62,13118.99 ; 4666.28,13132.8 ccw(c4666.28,13179.94) P1.3@4699.62,13146.6 ; 4666.28,13132.8 cw(c4666.28,13085.65) P1.3@4699.62,13118.99 ; P1.3@4699.62,13146.6 ccw(c4666.28,13179.94) 4713.43,13179.94 ; P1.3@4699.62,13146.6 ccw(c4666.28,13179.94) 4713.43,13179.94 ; P1.3@4699.62,13146.6 ccw(c4666.28,13179.94) 4713.43,13179.94 ; P1.3@4699.62,13146.6 ccw(c4666.28,13179.94) 4713.43,13179.94 ; NRF24L01.1@4702.77,13578.12 cw(c4677.03,13552.39) 4713.43,13552.39 ; NRF24L01.1@4702.77,13578.12 cw(c4677.03,13552.39) 4713.43,13552.39 ; NRF24L01.1@4702.77,13578.12 cw(c4677.03,13552.39) 4713.43,13552.39 ; NRF24L01.1@4702.77,13578.12 cw(c4677.03,13552.39) 4713.43,13552.39 ; 4713.43,13179.94 ccw(c4760.57,13179.94) P1.3@4727.23,13146.6 ; 4713.43,13179.94 ccw(c4760.57,13179.94) P1.3@4727.23,13146.6 ; 4713.43,13179.94 ccw(c4760.57,13179.94) P1.3@4727.23,13146.6 ; 4713.43,13179.94 ccw(c4760.57,13179.94) P1.3@4727.23,13146.6 ; 4713.43,13537.18 cw(c4771.32,13537.18) NRF24L01.1@4730.38,13578.12 ; 4713.43,13537.18 cw(c4771.32,13537.18) NRF24L01.1@4730.38,13578.12 ; 4713.43,13537.18 cw(c4771.32,13537.18) NRF24L01.1@4730.38,13578.12 ; 4713.43,13537.18 cw(c4771.32,13537.18) NRF24L01.1@4730.38,13578.12 ; P1.3@4727.23,13118.99 cw(c4760.57,13085.65) 4760.57,13132.8 ; P1.3@4727.23,13118.99 cw(c4760.57,13085.65) 4760.57,13132.8 ; P1.3@4727.23,13118.99 cw(c4760.57,13085.65) 4760.57,13132.8 ; P1.3@4727.23,13118.99 cw(c4760.57,13085.65) 4760.57,13132.8 ; P1.3@4727.23,13146.6 ccw(c4760.57,13179.94) 4760.57,13132.8 ; P1.3@4727.23,13146.6 ccw(c4760.57,13179.94) 4760.57,13132.8 ; P1.3@4727.23,13146.6 ccw(c4760.57,13179.94) 4760.57,13132.8 ; P1.3@4727.23,13146.6 ccw(c4760.57,13179.94) 4760.57,13132.8 ; 4766.28,13132.8 cw(c4766.28,13085.65) P2.3@4799.62,13118.99 ; 4766.28,13132.8 ccw(c4766.28,13179.94) P2.3@4799.62,13146.6 ; 4766.28,13132.8 ccw(c4766.28,13179.94) P2.3@4799.62,13146.6 ; 4766.28,13132.8 cw(c4766.28,13085.65) P2.3@4799.62,13118.99 ; 4766.28,13132.8 ccw(c4766.28,13179.94) P2.3@4799.62,13146.6 ; 4766.28,13132.8 cw(c4766.28,13085.65) P2.3@4799.62,13118.99 ; 4766.28,13132.8 ccw(c4766.28,13179.94) P2.3@4799.62,13146.6 ; 4766.28,13132.8 cw(c4766.28,13085.65) P2.3@4799.62,13118.99 ; P2.3@4827.23,13118.99 cw(c4860.57,13085.65) 4860.57,13132.8 ; P2.3@4827.23,13118.99 cw(c4860.57,13085.65) 4860.57,13132.8 ; P2.3@4827.23,13118.99 cw(c4860.57,13085.65) 4860.57,13132.8 ; P2.3@4827.23,13118.99 cw(c4860.57,13085.65) 4860.57,13132.8 ; P2.3@4827.23,13146.6 ccw(c4860.57,13179.94) 4860.57,13132.8 ; P2.3@4827.23,13146.6 ccw(c4860.57,13179.94) 4860.57,13132.8 ; P2.3@4827.23,13146.6 ccw(c4860.57,13179.94) 4860.57,13132.8 ; P2.3@4827.23,13146.6 ccw(c4860.57,13179.94) 4860.57,13132.8 ; 4866.28,13132.8 cw(c4866.28,13085.65) P3.3@4899.62,13118.99 ; 4866.28,13132.8 ccw(c4866.28,13179.94) P3.3@4899.62,13146.6 ; 4866.28,13132.8 ccw(c4866.28,13179.94) P3.3@4899.62,13146.6 ; 4866.28,13132.8 cw(c4866.28,13085.65) P3.3@4899.62,13118.99 ; 4866.28,13132.8 ccw(c4866.28,13179.94) P3.3@4899.62,13146.6 ; 4866.28,13132.8 cw(c4866.28,13085.65) P3.3@4899.62,13118.99 ; 4866.28,13132.8 ccw(c4866.28,13179.94) P3.3@4899.62,13146.6 ; 4866.28,13132.8 cw(c4866.28,13085.65) P3.3@4899.62,13118.99 ; P3.3@4927.23,13118.99 cw(c4960.57,13085.65) 4960.57,13132.8 ; P3.3@4927.23,13118.99 cw(c4960.57,13085.65) 4960.57,13132.8 ; P3.3@4927.23,13118.99 cw(c4960.57,13085.65) 4960.57,13132.8 ; P3.3@4927.23,13118.99 cw(c4960.57,13085.65) 4960.57,13132.8 ; P3.3@4927.23,13146.6 ccw(c4960.57,13179.94) 4960.57,13132.8 ; P3.3@4927.23,13146.6 ccw(c4960.57,13179.94) 4960.57,13132.8 ; P3.3@4927.23,13146.6 ccw(c4960.57,13179.94) 4960.57,13132.8 ; P3.3@4927.23,13146.6 ccw(c4960.57,13179.94) 4960.57,13132.8 ; 4966.28,13132.8 cw(c4966.28,13085.65) P4.3@4999.62,13118.99 ; 4966.28,13132.8 ccw(c4966.28,13179.94) P4.3@4999.62,13146.6 ; 4966.28,13132.8 ccw(c4966.28,13179.94) P4.3@4999.62,13146.6 ; 4966.28,13132.8 cw(c4966.28,13085.65) P4.3@4999.62,13118.99 ; 4966.28,13132.8 ccw(c4966.28,13179.94) P4.3@4999.62,13146.6 ; 4966.28,13132.8 cw(c4966.28,13085.65) P4.3@4999.62,13118.99 ; 4966.28,13132.8 ccw(c4966.28,13179.94) P4.3@4999.62,13146.6 ; 4966.28,13132.8 cw(c4966.28,13085.65) P4.3@4999.62,13118.99 ; P4.3@5027.23,13118.99 cw(c5060.57,13085.65) 5060.57,13132.8 ; P4.3@5027.23,13118.99 cw(c5060.57,13085.65) 5060.57,13132.8 ; P4.3@5027.23,13118.99 cw(c5060.57,13085.65) 5060.57,13132.8 ; P4.3@5027.23,13118.99 cw(c5060.57,13085.65) 5060.57,13132.8 ; P4.3@5027.23,13146.6 ccw(c5060.57,13179.94) 5060.57,13132.8 ; P4.3@5027.23,13146.6 ccw(c5060.57,13179.94) 5060.57,13132.8 ; P4.3@5027.23,13146.6 ccw(c5060.57,13179.94) 5060.57,13132.8 ; P4.3@5027.23,13146.6 ccw(c5060.57,13179.94) 5060.57,13132.8